# Altium PCB OptoIso.PcbDoc
Units mil, origin at the board's own origin, x right, y up, seen from the top; angles counter-clockwise.
Board outline 2340 x 1130 mil, 4 copper layers (Top Layer, GND, VCC, Bottom Layer), stack 20.326 mil thick; 27 components, 37 nets, 124 pads, 12 vias.
Unrouted connection lines stored in the file: 13.
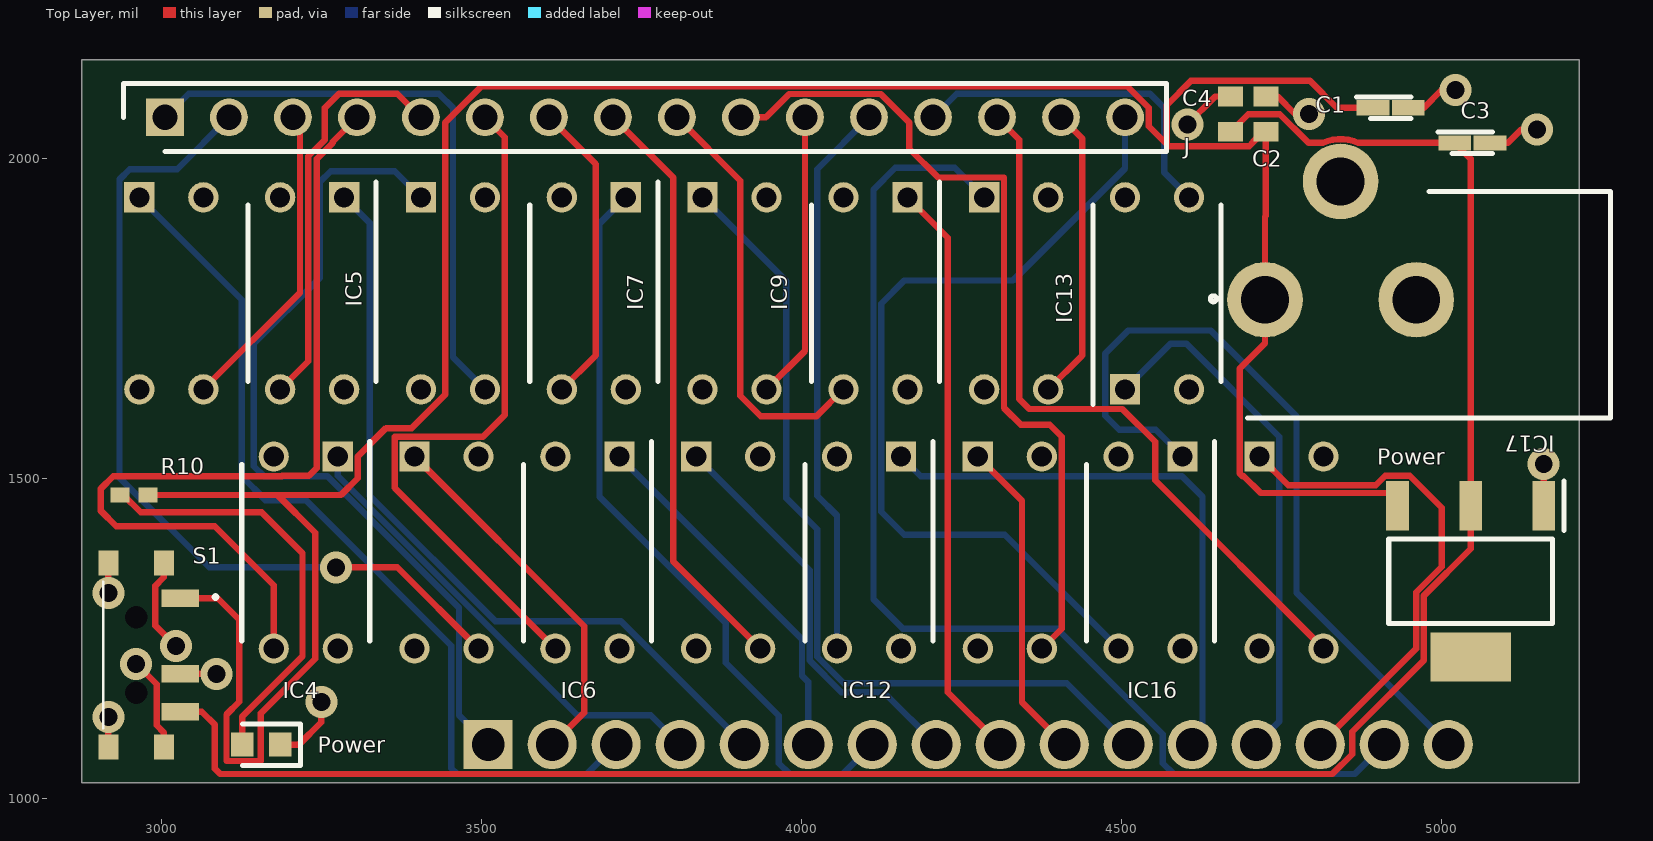
[diagram p0: Top Layer view]
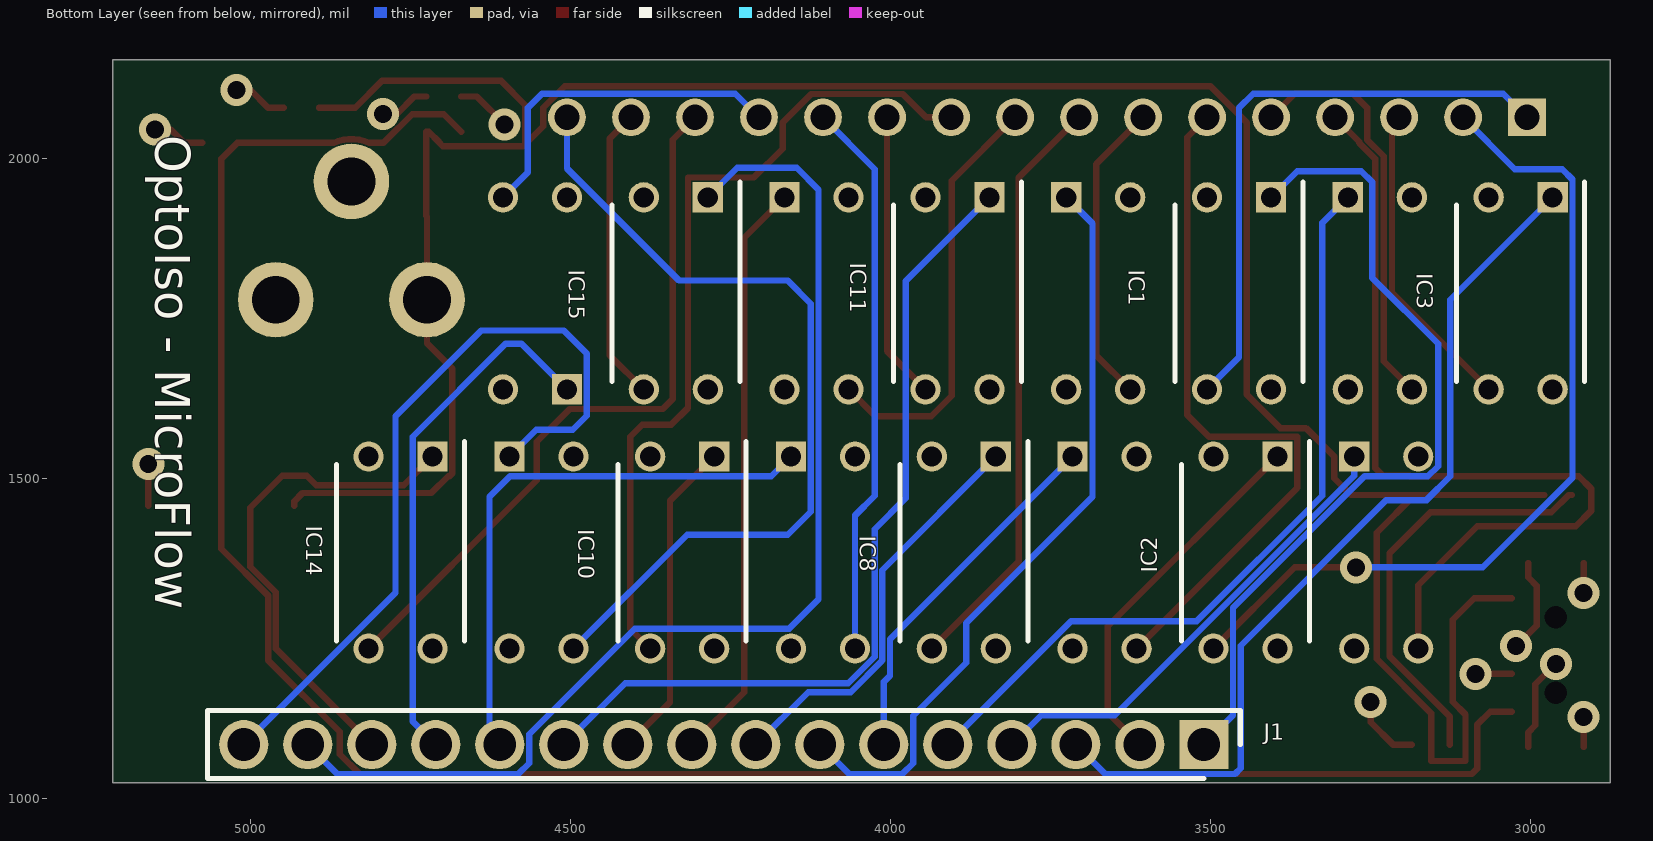
[diagram p1: Bottom Layer view, seen from below]
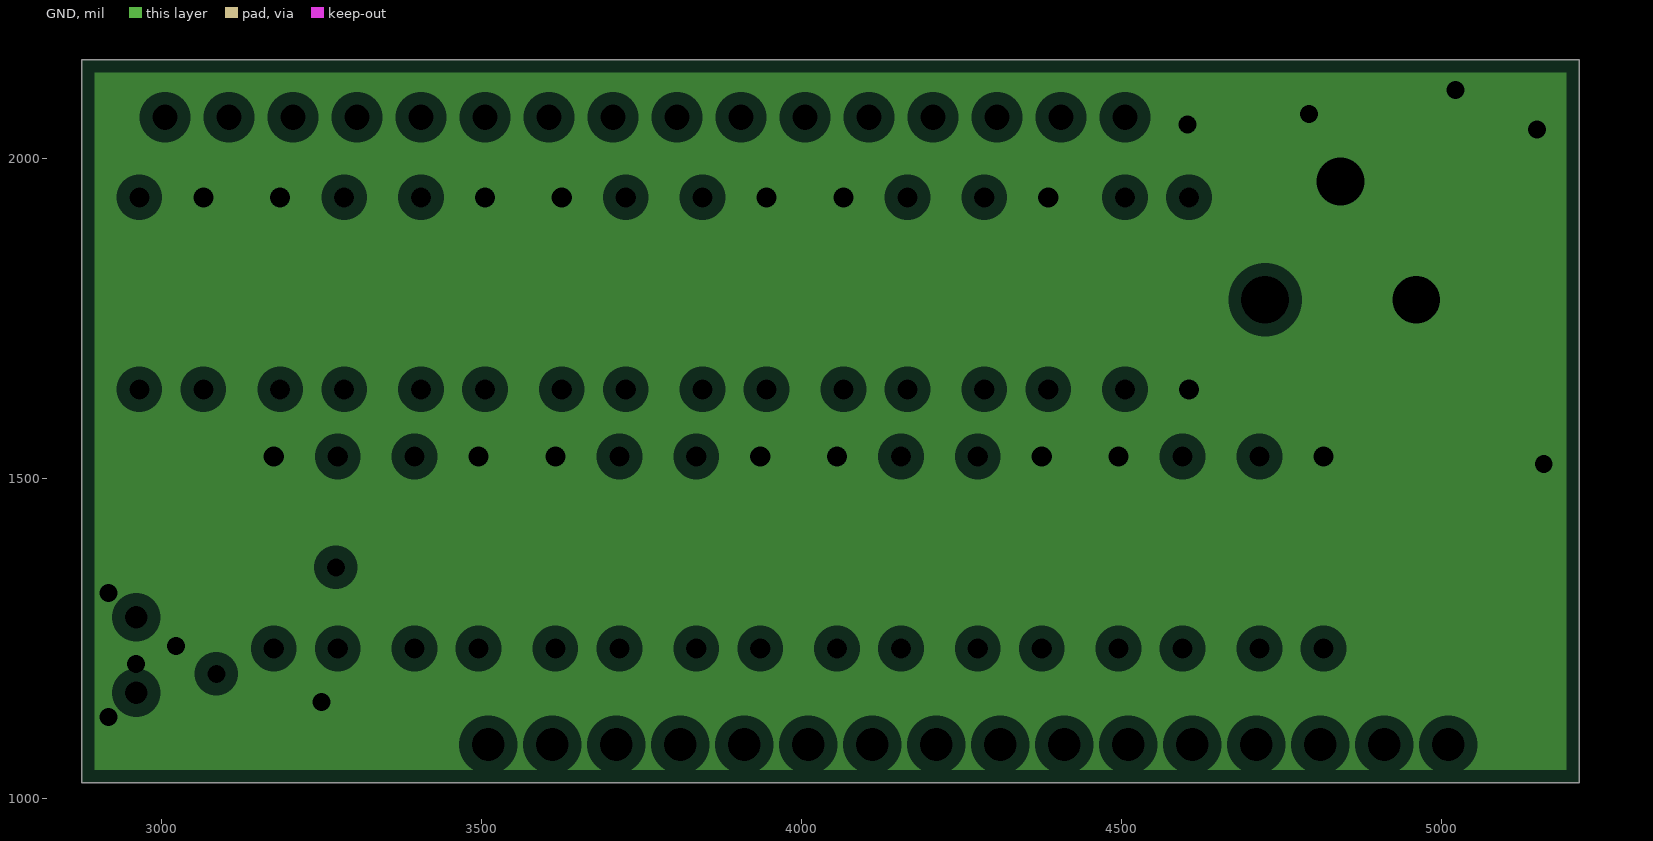
[diagram p2: GND, clearances drawn from the general rule]
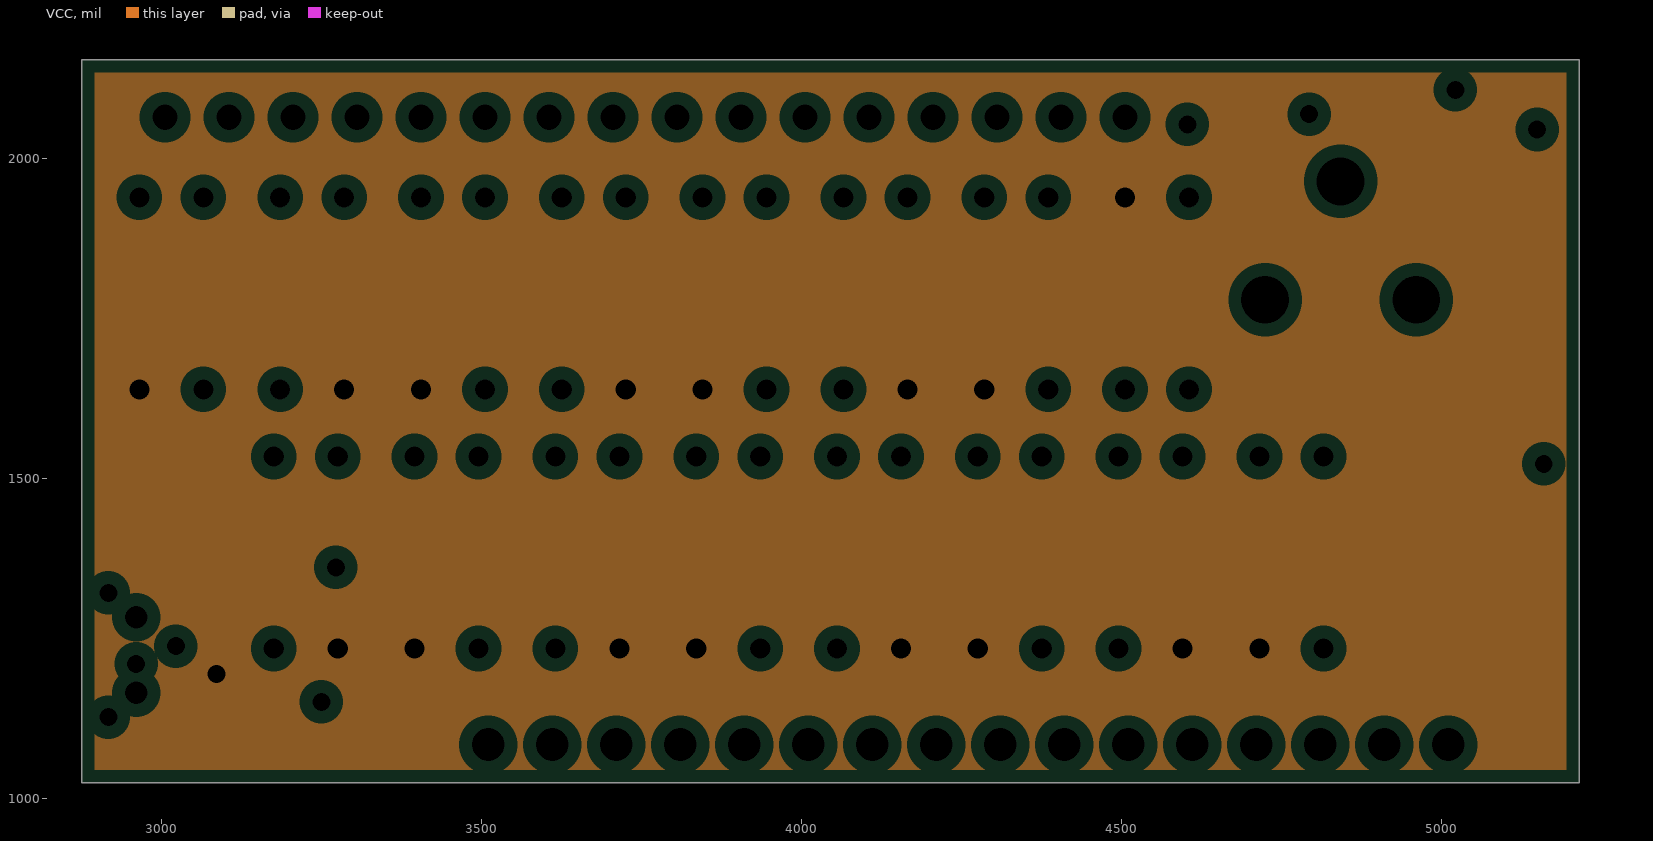
[diagram p3: VCC, clearances drawn from the general rule]
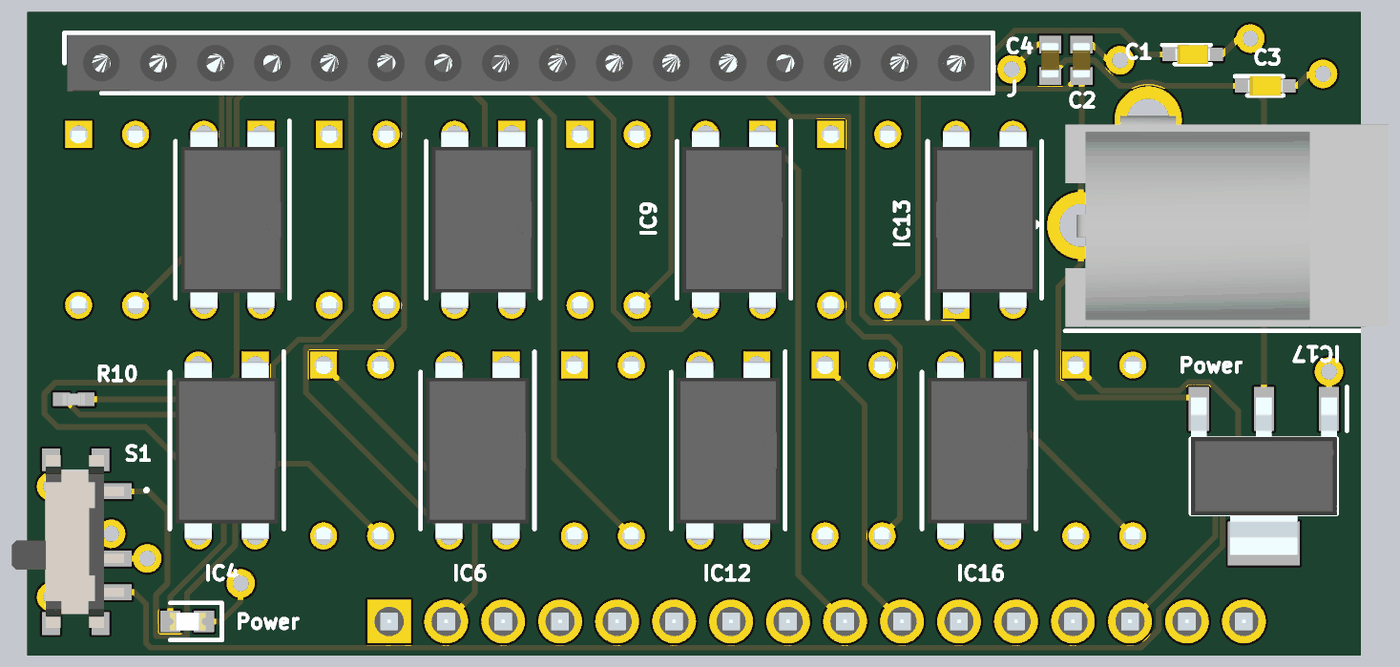
[diagram p4: 3D render of the assembled board from above, using the file's embedded part models]
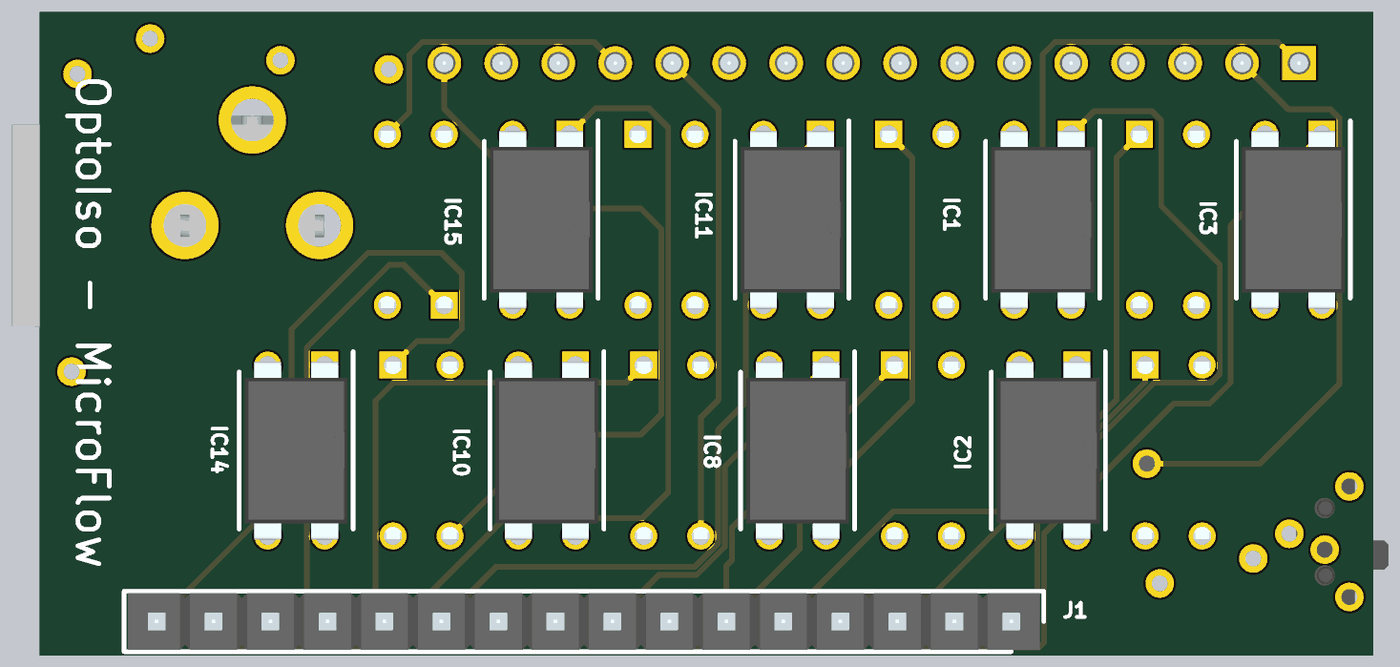
[diagram p5: 3D render of the assembled board from below, using the file's embedded part models]

## Layer stack, top to bottom
Top Solder: solder mask 0.4, Solder Resist, Dk 3.5
Top Layer: signal copper 0.3543
Dielectric 2: prepreg 2.8, PP-006, Dk 4.1
GND: plane copper 0.7087, net GND
Dielectric 1: dielectric 12.6, FR-4, Dk 4.8
VCC: plane copper 0.7087, net 5V/12V
Dielectric 3: prepreg 2.8, PP-006, Dk 4.1
Bottom Layer: signal copper 0.3543
Bottom Solder: solder mask 0.4, Solder Resist, Dk 3.5

## Board outline
2875,1025 2875,2155 5215,2155 5215,1025

## Design rules (kind name [scope] priority, off if disabled: settings)
Clearance [All] p1: gap=2 ignorepadtopadclearanceinfootprint=FALSE except(5: Fill-Fill Fill-Poly Fill-Region Fill-Text Fill-Hole Poly-Poly Poly-Region Poly-Text Poly-Hole Region-Region Region-Text Region-Hole Text-Text Text-Hole)
PlaneClearance [All] p1: clearance=20
PlaneConnect [All] p1: planeconnectstyle=Relief reliefexpansion=20 reliefentries=4 reliefconductorwidth=10 reliefairgap=10
PolygonConnect [All] p1: connectstyle=Relief reliefconductorwidth=10 reliefentries=4 polygonreliefangle="90 Angle" airgapwidth=10
RoutingVias [All] p1: holewidth=28 width=50 viastyle="Through Hole" minholewidth=28 minwidth=50 maxholewidth=28 maxwidth=50
SolderMaskExpansion [All] p1: expansion=4 istentingtop=FALSE
Width [All] p1: maxlimit=10 minlimit=10 preferedwidth=10
28 further rules are at their usual default settings.

## Components (designator, comment, footprint, x,y, rotation, side; value= is the part's Value field where it differs from the comment)
C1 "TCM0J106M8R" CAPPM168X90N 4920,2080 r0 top
C2 "0603YC104K4T2A" CAPC1608X90N 4725,2070 r270 top
C3 "TCM0J106M8R" CAPPM168X90N 5047.56,2025 r0 top
C4 "0603YC104K4T2A" CAPC1608X90N 4670,2070 r270 top
IC1 "PC817A" DIP762W60P254L458H450Q4N 3455,1790 r270 bottom
IC2 "PC817A" DIP762W60P254L458H450Q4N 3445,1385 r270 bottom
IC3 "PC817A" DIP762W60P254L458H450Q4N 3015,1790 r270 bottom
IC4 "PC817A" DIP762W60P254L458H450Q4N 3225,1385 r270 top
IC5 "PC817A" DIP762W60P254L458H450Q4N 3235,1790 r270 top
IC6 "PC817A" DIP762W60P254L458H450Q4N 3665,1385 r270 top
IC7 "PC817A" DIP762W60P254L458H450Q4N 3675,1790 r270 top
IC8 "PC817A" DIP762W60P254L458H450Q4N 3885,1385 r270 bottom
IC9 "PC817A" DIP762W60P254L458H450Q4N 4115,1790 r270 top
IC10 "PC817A" DIP762W60P254L458H450Q4N 4325,1385 r270 bottom
IC11 "PC817A" DIP762W60P254L458H450Q4N 3895,1790 r270 bottom
IC12 "PC817A" DIP762W60P254L458H450Q4N 4105,1385 r270 top
IC13 "PC817A" DIP762W60P254L458H450Q4N 4555,1790 r90 top
IC14 "PC817A" DIP762W60P254L458H450Q4N 4765,1385 r270 bottom
IC15 "PC817A" DIP762W60P254L458H450Q4N 4335,1790 r270 bottom
IC16 "PC817A" DIP762W60P254L458H450Q4N 4545,1385 r270 top
IC17 "AMS1117-5.0" SOT290P700X180-4N 5045,1340 r270 top
J "61301611821" RHDR16W82P0X254_1X16_4114X250X865P 3005,2065 r0 top (schematic designator J?)
J1 "61301611121" HDRV16W79P0X254_1X16_4064X254X874P 3510,1085 r0 bottom
Power "LTST-C190GKT" LEDC1608X90N 3155.47,1085 r180 top (schematic designator Power_Led)
Power "PJ-102BH" PJ-102AH 4841.89,1949.29 r270 top
R10 "CR0402-FX-3300GLF" RESC1005X40N 2956.65,1475 r0 top
S1 "PCM12SMTR" PCM12SMTR 2960,1225 r270 top

## Footprints (in the part's own frame and the unit in brackets; to place one, negate y for a bottom-side part, rotate by r counter-clockwise, add the part's x,y. Pads: shape width x height; smd on the part's side, far side on the other; paste and mask are expansions set on the pad)
CAPC1608X90N [mm]
  rect 0.78x0.99 smd: 1(-0.7,0) 2(0.7,0)
  body extent -0.8,-0.41 0.8,0.41, height 0.9
CAPPM168X90N [mm]
  rect 1.3x0.6 smd: 1(-0.7,0) 2(0.7,0)
  silkscreen extent -1.35,-0.42 0.8,0.42, body extent -0.8,-0.43 0.8,0.43, height 0.9
DIP762W60P254L458H450Q4N [mm]
  rect 1.2x1.2 hole 0.8: 1(-3.81,1.27)
  round 1.2 hole 0.8: 2(-3.81,-1.27) 3(3.81,-1.27) 4(3.81,1.27)
  silkscreen extent -4.41,-2.54 3.5,2.54, body extent -3.96,-2.29 3.96,2.29, height 4.5
HDRV16W79P0X254_1X16_4064X254X874P [mm]
  rect 1.95x1.95 hole 1.3: 1(0,0)
  round 1.95 hole 1.3: 2(2.54,0) 3(5.08,0) 4(7.62,0) 5(10.16,0) 6(12.7,0) 7(15.24,0) 8(17.78,0) 9(20.32,0) 10(22.86,0) 11(25.4,0) 12(27.94,0) 13(30.48,0) 14(33.02,0) 15(35.56,0) 16(38.1,0)
  silkscreen extent -1.45,-1.34 39.55,1.34, body extent -1.27,-1.27 39.37,1.27, height 8.74
LEDC1608X90N [mm]
  rect 0.9x0.95 smd: 1(-0.75,0) 2(0.75,0)
  silkscreen extent -1.55,-0.82 0.75,0.82, body extent -0.82,-0.4 0.78,0.4, height 0.8
PCM12SMTR [mm]
  rect 0.7x1.5 smd: 1(-2.25,1.75) 2(0.75,1.75) 3(2.25,1.75)
  round 0.45 hole 0.9 unplated: MH1(-1.5,0) MH2(1.5,0)
  rect 1x0.8 smd: MP1(-3.65,1.1) MP2(-3.65,-1.1) MP3(3.65,-1.1) MP4(3.65,1.1)
  silkscreen extent -2.9,-1.3 2.9,3.2, body extent -3.85,-2.84 3.85,2.16, height 1.41
PJ-102AH [mm]
  round 3 hole 1.9: 1(4.3,-3) 2(4.3,3) 3(-0.4,0)
  silkscreen extent 0,-5.17 9,10.7, body extent -0.59,-3.69 8.81,10.71, height 11.26
RESC1005X40N [mm]
  rect 0.75x0.6 smd: 1(-0.55,0) 2(0.55,0)
  body extent -0.5,-0.25 0.5,0.25, height 0.35
RHDR16W82P0X254_1X16_4114X250X865P [mm]
  rect 1.5x1.5 hole 1: 1(0,0)
  round 1.5 hole 1: 2(2.54,0) 3(5.08,0) 4(7.62,0) 5(10.16,0) 6(12.7,0) 7(15.24,0) 8(17.78,0) 9(20.32,0) 10(22.86,0) 11(25.4,0) 12(27.94,0) 13(30.48,0) 14(33.02,0) 15(35.56,0) 16(38.1,0)
  silkscreen extent -1.65,-1.35 39.75,1.35, body extent -1.52,-1.25 39.62,1.25, height 8.65
SOT290P700X180-4N [mm]
  rect 1.95x0.9 smd: 1(-3,2.9) 2(-3,0) 3(-3,-2.9)
  rect 1.95x3.2 smd: 4(3,0)
  silkscreen extent -3.97,-3.25 1.67,3.7, body extent -3.5,-3.25 3.5,3.25, height 1.8

## Part data
C1 C3: "Capacitor Polarised", Manufacturer_Name="ROHM Semiconductor", Mouser Part Number=755-TCM0J106M8R, Arrow Part Number=TCM0J106M8R, Arrow Price/Stock=https://www.arrow.com/en/products/tcm0j106m8r/rohm-semiconductor, Datasheet Link=https://datasheet.datasheetarchive.com/originals/distributors/Datasheets_SAMA/255248ae09371697a9bedad935b0557d.pdf, Height=0.9mm, Manufacturer_Part_Number=TCM0J106M8R, Mouser Price/Stock=https://www.mouser.com/Search/Refine.aspx?Keyword=755-TCM0J106M8R
C2 C4: "Capacitor", Manufacturer_Name=AVX, Mouser Part Number=581-0603YC104K4, Arrow Part Number=0603YC104K4T2A, Arrow Price/Stock=https://www.arrow.com/en/products/0603yc104k4t2a/avx, Datasheet Link=https://componentsearchengine.com/Datasheets/1/06031A100FAT2A.pdf, Height=0.9mm, Manufacturer_Part_Number=0603YC104K4T2A, Mouser Price/Stock=https://www.mouser.co.uk/ProductDetail/AVX/0603YC104K4T2A/?qs=Cej1j9ztgjHj4I01NaBI3A%3D%3D
IC1 IC2 IC3 IC4 IC5 IC6 IC7 IC8 IC9 IC10 IC11 IC12 IC13 IC14 IC15 IC16: "Integrated Circuit", Manufacturer_Name="Sharp Microelectronics", Datasheet Link=https://pdf1.alldatasheet.com/datasheet-pdf/view/43370/SHARP/PC817A.html, Height=4.5mm, Manufacturer_Part_Number=PC817A
IC17: "Integrated Circuit", Manufacturer_Name=Shikues, Datasheet Link=https://datasheet.lcsc.com/szlcsc/SK-AMS1117-5-0_C165483.pdf, Height=1.8mm, Manufacturer_Part_Number=AMS1117-5.0
J: "Connector", Manufacturer_Name="Wurth Elektronik", Mouser Part Number=710-61301611821, Datasheet Link=https://www.we-online.com/catalog/datasheet/61301611821.pdf, Height=8.65mm, Manufacturer_Part_Number=61301611821, Mouser Price/Stock=https://www.mouser.co.uk/ProductDetail/Wurth-Elektronik/61301611821?qs=xZ%2FP%252Ba9zWqYIxo6RU%252B1Wuw%3D%3D
J1: "Connector", Manufacturer_Name="Wurth Elektronik", Mouser Part Number=710-61301611121, Datasheet Link=https://www.we-online.com/catalog/datasheet/61301611121.pdf, Height=8.74mm, Manufacturer_Part_Number=61301611121, Mouser Price/Stock=https://www.mouser.co.uk/ProductDetail/Wurth-Elektronik/61301611121?qs=PhR8RmCirEYq%2F9PEO1%2F%252B%252Bg%3D%3D
Power: "LED", Manufacturer_Name=Lite-On, Mouser Part Number=859-LTST-C190GKT, Arrow Part Number=LTST-C190GKT, Arrow Price/Stock=https://www.arrow.com/en/products/ltst-c190gkt/lite-on-technology?region=nac, Datasheet Link=https://media.digikey.com/pdf/Data%20Sheets/Lite-On%20PDFs/LTST-C190GKT.pdf, Height=0.9mm, Manufacturer_Part_Number=LTST-C190GKT, Mouser Price/Stock=https://www.mouser.co.uk/ProductDetail/Lite-On/LTST-C190GKT?qs=drxkyCeiWgbQzclgbojDOg%3D%3D
Power: "Connector", Manufacturer_Name="CUI Devices", Mouser Part Number=490-PJ-102BH, Arrow Part Number=PJ-102BH, Arrow Price/Stock=https://www.arrow.com/en/products/pj-102bh/cui-devices?region=nac, Datasheet Link=https://componentsearchengine.com/Datasheets/1/PJ-102BH.pdf, Manufacturer_Part_Number=PJ-102BH, Mouser Price/Stock=https://www.mouser.co.uk/ProductDetail/CUI-Devices/PJ-102BH?qs=WyjlAZoYn51LQvDYqCqBtA%3D%3D
R10: "Resistor", Manufacturer_Name=Bourns, Mouser Part Number=652-CR0402FX-3300GLF, Arrow Part Number=CR0402-FX-3300GLF, Arrow Price/Stock=https://www.arrow.com/en/products/cr0402-fx-3300glf/bourns, Datasheet Link=https://www.bourns.com/pdfs/CR0402.pdf, Height=0.4mm, Manufacturer_Part_Number=CR0402-FX-3300GLF, Mouser Price/Stock=https://www.mouser.co.uk/ProductDetail/Bourns/CR0402-FX-3300GLF?qs=SFHnMgm9IsyaL104gdTOhg%3D%3D
S1: "Switch", Manufacturer_Name="C & K COMPONENTS", Mouser Part Number=611-PCM12SMTR, Arrow Part Number=PCM12SMTR, Arrow Price/Stock=https://www.arrow.com/en/products/pcm12smtr/ck?region=nac, Datasheet Link=https://www.ckswitches.com/media/1424/pcm.pdf, Height=1.4mm, Manufacturer_Part_Number=PCM12SMTR, Mouser Price/Stock=https://www.mouser.co.uk/ProductDetail/CK/PCM12SMTR?qs=mfFuHy8STfL3qrPSfCHA7w%3D%3D

## Via types
v1: diameter 50, hole 28, Top Layer to Bottom Layer, 12 vias

## Nets (pads, with @x,y where several pads share a name; then routed paths per layer and width w, separated by ;. In a path a pad name is that pad's centre, name@x,y a point inside that pad or via, vN(x,y) a via of type N, cw(c..) or ccw(c..) an arc to the next point about the centre after c; other vN are vias at no path point)
1: IC1.1 J1.1 | length 1313.3
  Bottom Layer w10: IC1.1 3364,1981 3264,1981 3247,1964 3247,1814 3144,1711 3144,1520 3160,1504 3259.03,1504 3464.38,1298.65 3464.38,1130.62 J1.1
2: IC2.1 J1.2 | length 580.5
  Top Layer w10: IC2.1 3660,1270 3660,1135 J1.2
3: IC3.1 J1.3 | length 1411.2
  Bottom Layer w10: IC3.1 3125,1780 3125,1504 3162,1467 3225,1467 3452.38,1239.62 3452.38,1048 3461.38,1039 3664,1039 J1.3
4: IC4.1 J1.4 | length 739
  Bottom Layer w10: IC4.1 3275,1505 3649,1131 3764,1131 J1.4
5: IC5.1 J1.5 | length 1228.7
  Bottom Layer w10: IC5.1 3325,1900 3325,1474 3521,1278 3717,1278 J1.5
5V/12V: IC1.4 IC2.4 IC3.4 IC4.4 IC5.4 IC6.4 IC7.4 IC8.4 IC9.4 IC10.4 IC11.4 IC12.4 IC13.4 IC14.4 IC15.4 IC16.4 S1.2 | length 56.5
  Top Layer w10: S1.2 v1(3085.43,1195.47)
5VS: C3.1 C4.2 IC17.2 S1.3 | length 3348.3
  Top Layer w10: S1.3 3062.58,1136.42 3083.09,1115.91 3083.09,1047.3 3091.38,1039 4829,1039 4860,1070 4860,1105 4972,1217 4972,1318 5045,1391 IC17.2 5045,2000 C3.1 4869.6,2025 ccw(c4841.89,1965.04) 4814.18,2025 4792,2025 4789.07,2027.93 4747,2070 4697.56,2070 C4.2
6: IC6.1 J1.6 | length 572.2
  Bottom Layer w10: IC6.1 4000.38,1249.62 4000.38,1192.49 4010,1182.87 J1.6
7: IC7.1 J1.7 | length 1189.1
  Bottom Layer w10: IC7.1 3684,1899 3684,1472 3881,1275 3881,1213 3964,1130 3964,1056 3981,1039 4064,1039 J1.7
8: IC8.1 J1.8 | length 644.1
  Bottom Layer w10: IC8.1 4012.38,1357.62 4012.38,1216.49 4061.87,1167 4128,1167 J1.8
9: IC9.1 J1.9 | length 915.1
  Top Layer w10: IC9.1 4228,1877 4228,1167 J1.9
10: IC10.1 J1.10 | length 505.9
  Top Layer w10: IC10.1 4344,1466 4344,1151 J1.10
11: IC11.1 J1.11 | length 1334.5
  Bottom Layer w10: IC11.1 3976,1809 3976,1470 4024.38,1421.62 4024.38,1222.31 4065.69,1181 4414,1181 J1.11
12: IC12.1 J1.12 | length 900.1
  Bottom Layer w10: IC12.1 4186,1504 4594,1504 4626,1472 4626,1085 J1.12
12VS: C1.1 C2.2 IC17.3 Power.1@4723.78,1780 R10.2 S1.1 | length 4448.7
  Top Layer w10: R10.2 3181,1475 ; S1.1 3087.42,1313.58 3121,1280 3121,1151.77 3101.23,1132 3101.23,1059.3 3155,1059.3 3155,1134 3240,1219 3240,1416 3181,1475 ; C1.1 4836,2080 4794,2122 4608,2122 4570,2084 4570,2023 ; IC17.3 4930.83,1465.28 4918.11,1478 4717,1478 4690.62,1504.38 4688.48,1504.38 4684.38,1508.48 4684.38,1510.62 4684,1511 4684,1672 4723.78,1711.78 4723.78,1780 4723.78,1910 4725,1911.22 C2.2 4720.87,2042.44 4705,2026.58 4705,2025.86 4699.14,2020 4573,2020 4570,2023 ; 3181,1475 3280,1475 3306,1501 3306,1535.04 3350.48,1579.52 3390.52,1579.52 3443,1632 3443,2057 3499.53,2113.53 4508.47,2113.53 4542,2080 4542,2051 4570,2023
13: IC13.1 J1.13 | length 826.4
  Bottom Layer w10: IC13.1 4576,1711 4601,1711 4746,1566 4746,1121 J1.13
14: IC14.1 J1.14 | length 779.2
  Top Layer w10: IC14.1 4760,1490 4896.71,1490 4911.71,1505 4949.94,1505 5000,1454.94 5000,1362.97 4960,1322.97 4960,1235 J1.14
15: IC15.1 J1.15 | length 1802.6
  Bottom Layer w10: IC15.1 4239,1986 4146,1986 4112,1952 4112,1312 4158,1266 4399,1266 4564,1101 4564,1056 4581,1039 4864,1039 J1.15
16: IC16.1 J1.16 | length 1225.1
  Bottom Layer w10: IC16.1 4553,1577 4496,1577 4474,1599 4474,1696 4510,1732 4639,1732 4773,1598 4773,1322 J1.16
GND: C1.2 C2.1 C3.2 C4.1 IC1.2 IC2.2 IC3.2 IC4.2 IC5.2 IC6.2 IC7.2 IC8.2 IC9.2 IC10.2 IC11.2 IC12.2 IC13.2 IC14.2 IC15.2 IC16.2 IC17.1 Power.1@3185,1085 Power.2@4960,1780 Power.3 S1.MP1 S1.MP2 S1.MP3 S1.MP4 | length 898
  Top Layer w10: S1.MP3 v1(2916.69,1127.99) ; v1(2916.69,1322.01) S1.MP2 ; v1(2960,1211.07) 2992,1179.07 2992,1115.12 3003.31,1103.81 S1.MP4 ; S1.MP1 3003.31,1346.19 2990,1332.88 2990,1270.93 v1(3022,1238.93) ; Power.1@3185,1085 3214.47,1085 3249.47,1120 v1(3249.47,1151.79) ; v1(4602.43,2054) 4645.99,2097.56 C4.1 ; C2.1 4743.67,2097.56 4771.23,2070 v1(4792.57,2070) ; C1.2 4972.11,2080 5000.11,2108 v1(5021.24,2108) ; C3.2 5103.17,2025 5124.17,2046 v1(5148.8,2046) ; IC17.1 v1(5159.17,1523.5)
NetPower_Led_2: Power.2@3125.94,1085 R10.1 | length 660.7
  Top Layer w10: R10.1 2940,1475 2967,1448 3156,1448 3220,1384 3220,1223 3125.94,1128.94 Power.2@3125.94,1085
U1: IC1.3 J.1 | length 935.1
  Bottom Layer w10: J.1 3042,2102 3433,2102 3455,2080 3455,1690 IC1.3
U2: IC2.3 J.2 | length 1348.8
  Top Layer w10: v1(3272,1362) 3368,1362 IC2.3
  Bottom Layer w10: J.2 3024,1984 2950,1984 2934,1968 2934,1502 3074,1362 v1(3272,1362)
U3: IC3.3 J.3 | length 498.5
  Top Layer w10: IC3.3 3216,1791 3216,2065 J.3
U4: IC4.3 J.4 | length 1376.4
  Top Layer w10: IC4.3 3175,1334 3083,1426 2929,1426 2905,1450 2905,1485 2924.38,1504.38 3187.68,1504.38 3188.31,1505 3230,1505 3242,1517 3242,2000.03 3267,2025.03 3267,2027 J.4
U5: IC5.3 J.5 | length 643.4
  Top Layer w10: IC5.3 3229,1684 3229,2004 3255,2030 3255,2080 3277,2102 3368,2102 J.5
U6: IC6.3 J.6 | length 1098.9
  Top Layer w10: J.6 3536,2034 3536,1600 3502,1566 3364,1566 3364,1486 IC6.3
U7: IC7.3 J.7 | length 477.2
  Top Layer w10: J.7 3678,1992 3678,1693 IC7.3
U8: IC8.3 J.8 | length 925.3
  Top Layer w10: J.8 3799,1971 3799,1371 IC8.3
U9: IC9.3 J.9 | length 667.7
  Top Layer w10: J.9 3904,1966 3904,1630 3936,1598 4023,1598 IC9.3
U10: IC10.3 J.10 | length 1316.7
  Top Layer w10: J.10 3944,2065 3980.53,2101.53 4123.47,2101.53 4168,2057 4168,2016 4213,1971 4316,1971 4316,1610.97 4342.38,1584.59 4387.41,1584.59 4406,1566 4406,1266 IC10.3
U11: IC11.3 J.11 | length 449.9
  Top Layer w10: IC11.3 4005,1700 J.11
U12: IC12.3 J.12 | length 876.4
  Bottom Layer w10: IC12.3 4055,1443 4024,1474 4024,1984 J.12
U13: IC13.3 J.13 | length 541.6
  Bottom Layer w10: J.13 4242,2102 4544,2102 4566,2080 4566,1979 IC13.3
U14: IC14.3 J.14 | length 1126.2
  Top Layer w10: J.14 4340,2030 4340,1625 4355.62,1609.38 4500.62,1609.38 4552,1558 4552,1498 IC14.3
U15: IC15.3 J.15 | length 460.6
  Top Layer w10: IC15.3 4438,1693 4438,2032 J.15
U16: IC16.3 J.16 | length 1333
  Bottom Layer w10: IC16.3 4317,1413 4160,1413 4124,1449 4124,1774 4160,1810 4330,1810 4505,1985 J.16
pads on no net: IC17.4 S1.MH1 S1.MH2

## Polygon pours and split planes (outlines as drawn)
GND on GND (split plane): 5194.9,1045.1 2895.1,1045.1 2895.1,2134.9 5194.9,2134.9
5V/12V on VCC (split plane): 5194.9,1045.1 2895.1,1045.1 2895.1,2134.9 5194.9,2134.9

## Silkscreen, mask and mechanical layers (free items; w line width, h text height)
Bottom Overlay:
  text "OptoIso - MicroFlow" at 5147.99,2037.36 h55 r90